# Altium PCB Throttle By Wire.PcbDoc
Units mm, origin at the board's own origin, x right, y up, seen from the top; angles counter-clockwise.
Board outline 70 x 50 mm, 2 copper layers (Top Layer, Bottom Layer); 12 components, 12 nets, 84 pads, 5 vias.
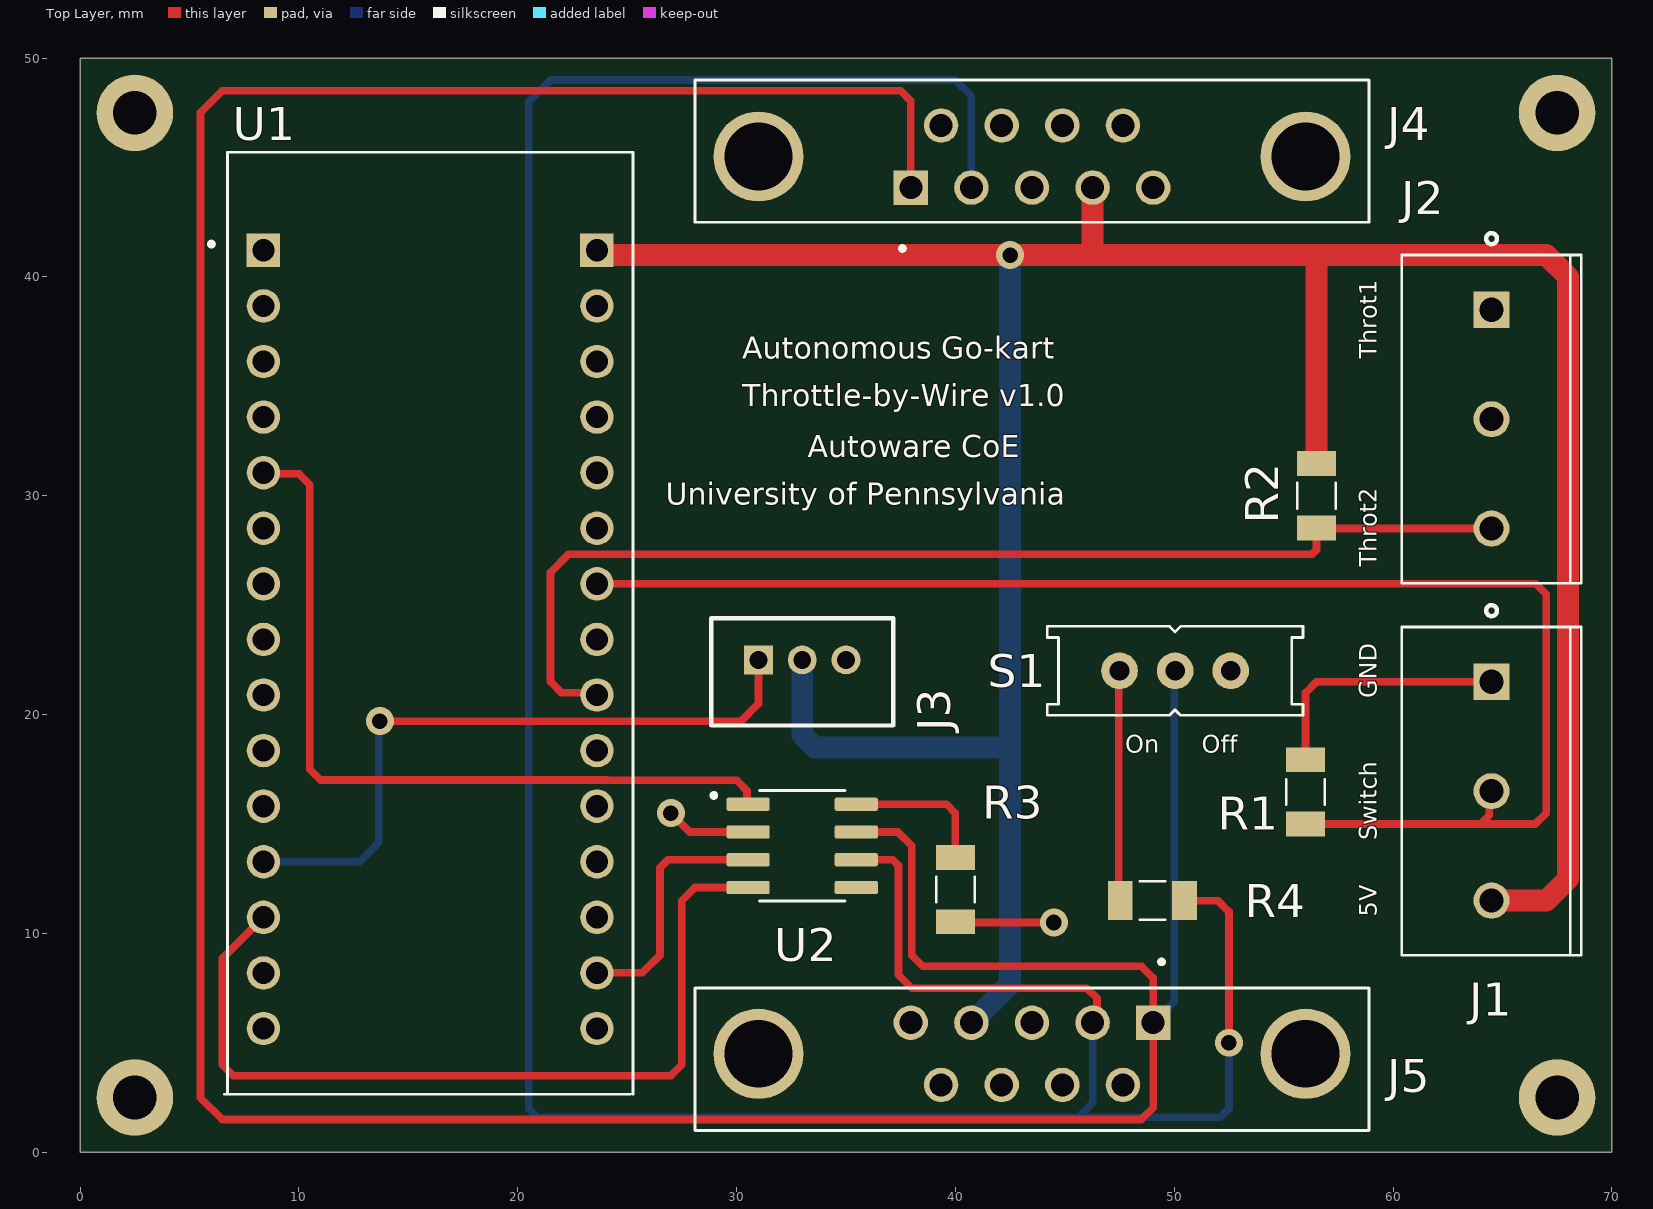
[diagram p0: Top Layer view]
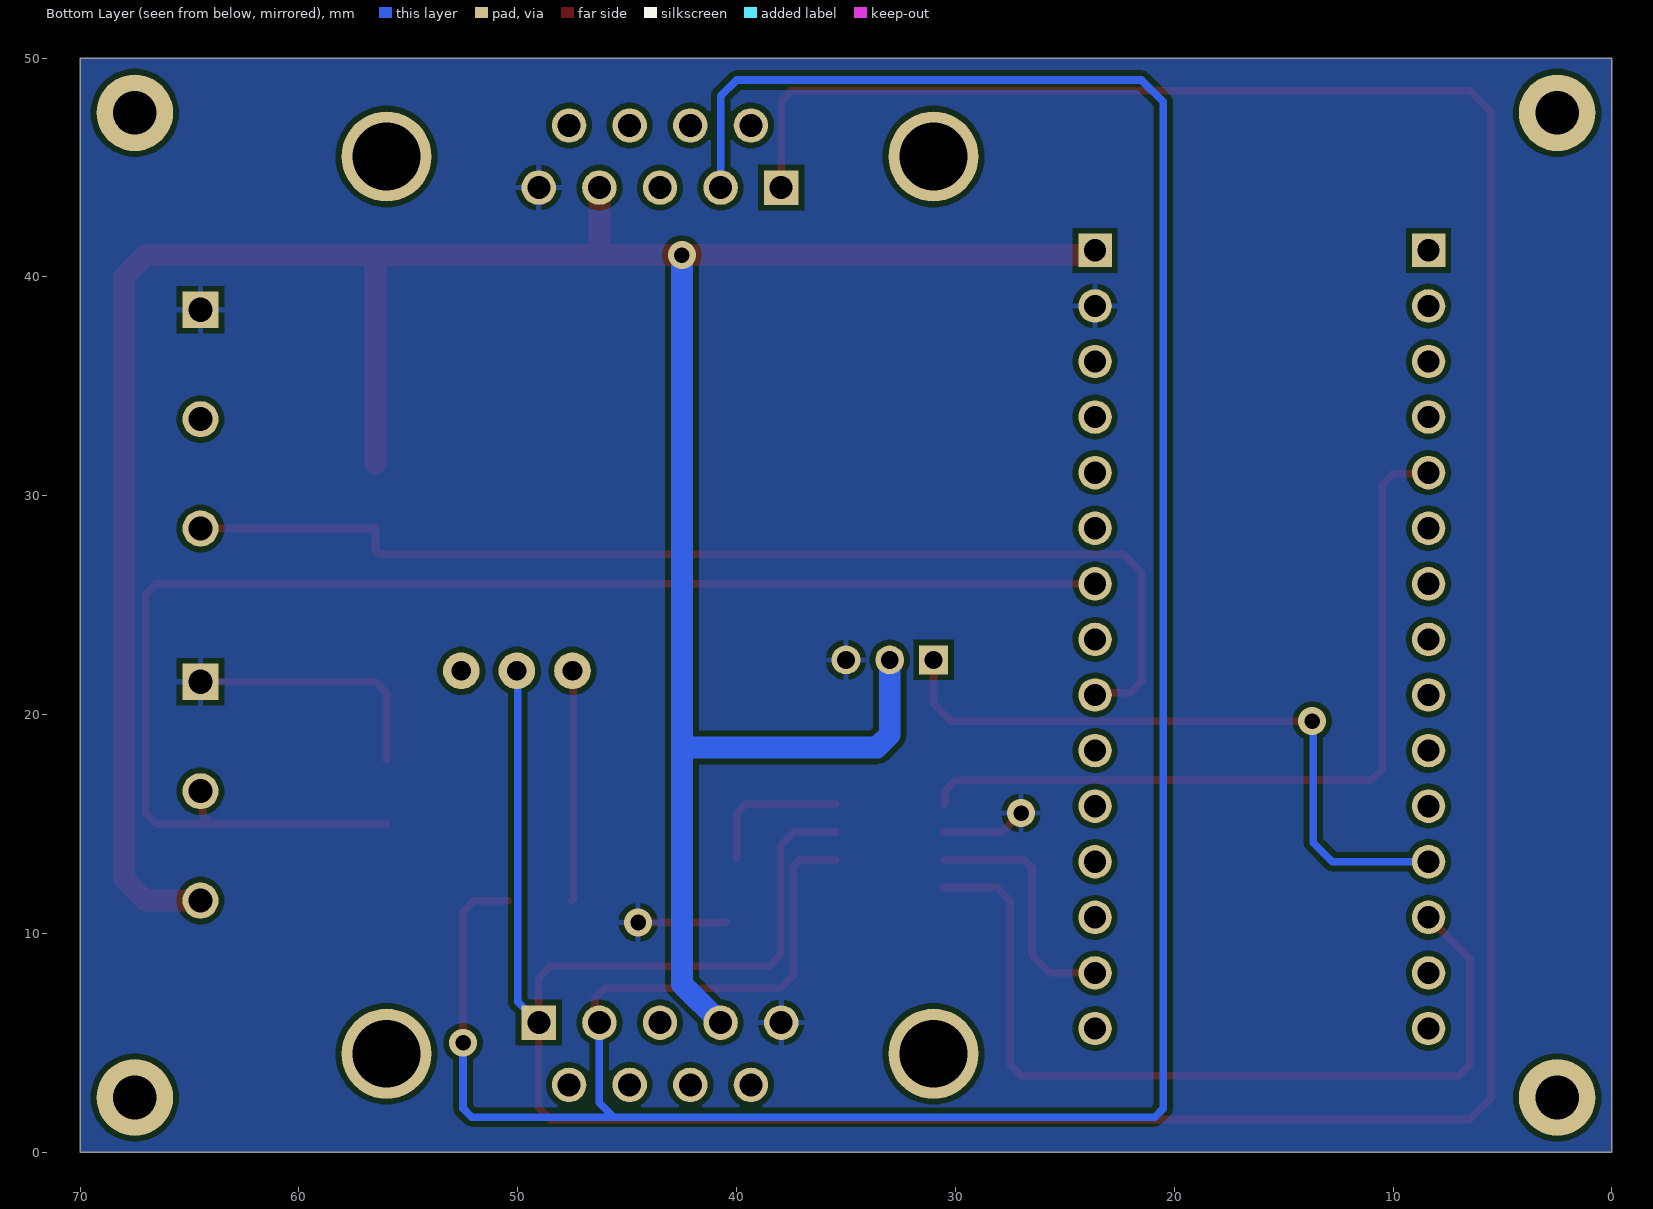
[diagram p1: Bottom Layer view, seen from below]

## Layer stack, top to bottom
Top Solder: solder mask 0.0102, Solder Resist, Dk 3.5
Top Layer: signal copper 0.0356
Dielectric 1: dielectric 0.32, FR-4, Dk 4.8
Bottom Layer: signal copper 0.0356
Bottom Solder: solder mask 0.0102, Solder Resist, Dk 3.5

## Board outline
0,0 0,50 70,50 70,0

## Design rules (kind name [scope] priority, off if disabled: settings)
Clearance [All] p1: gap=0.254 ignorepadtopadclearanceinfootprint=FALSE except(0: Arc-Hole Track-Hole SMDPad-Hole THPad-Hole Via-Hole Fill-Hole Poly-Hole Region-Hole Text-Hole)
HoleSize [All] p1: absolutevalues=TRUE maxlimit=5 minlimit=0.025 maxpercent=80.000 minpercent=20.000
PolygonConnect [All] p1: connectstyle=Relief reliefconductorwidth=0.254 reliefentries=4 polygonreliefangle="90 Angle" airgapwidth=0.254
RoutingVias [All] p1: holewidth=0.711 width=1.27 viastyle="Through Hole" minholewidth=0.711 minwidth=1.27 maxholewidth=0.711 maxwidth=1.27
SolderMaskExpansion [All] p1: expansion=0.102 istentingtop=FALSE
Width [All] p1: maxlimit=2 minlimit=0.254 preferedwidth=0.35 minimp=50.000000 maximp=50.000000 favimp=50.000000
29 further rules are at their usual default settings.

## Classes and differential pairs
component class Sheet1: J1 J5 R1 R2 R3 R4 S1 U1 U2

## Components (designator, comment, footprint, x,y, rotation, side; value= is the part's Value field where it differs from the comment)
J1 "282836-3" TE_282836-3 64.5,16.5 r270 top
J2 "282836-3" TE_282836-3 64.5,33.5 r270 top
J3 "B3B-PH-K" B3B-PH-K 33,22.5 r0 top
J4 "A-DF_09_A_KG-T2S" ASSMANN_A-DF_09_A_KG-T2S 43.5,45.5 r180 top
J5 "A-DF_09_A_KG-T2S" ASSMANN_A-DF_09_A_KG-T2S 43.5,4.5 r0 top
R1 "66K" RESC3216X65N 56,16.47 r90 top
R2 "2.5K" RESC3216X65N 56.5,30 r90 top
R3 "10K" RESC3216X65N 40,12 r270 top
R4 "120" RESC3216X65N 49,11.5 r0 top
S1 "EG1218" EG1218 50.04,22 r180 top
U1 "NUCLEO-L432KC" MODULE_NUCLEO-L432KC 16,25 r0 top
U2 "SN65HVD230QDR" SOIC127P599X175-8N 33,14 r0 top

## Footprints (in the part's own frame and the unit in brackets; to place one, negate y for a bottom-side part, rotate by r counter-clockwise, add the part's x,y. Pads: shape width x height; smd on the part's side, far side on the other; paste and mask are expansions set on the pad)
ASSMANN_A-DF_09_A_KG-T2S [mm]
  rect 1.575x1.575 / inner round 1.575 / far side rect 1.575x1.575 hole 1.05: 1(5.54,1.42)
  round 1.575 hole 1.05: 2(2.77,1.42) 3(0,1.42) 4(-2.77,1.42) 5(-5.54,1.42) 6(4.155,-1.42) 7(1.385,-1.42) 8(-1.385,-1.42) 9(-4.155,-1.42)
  round 4.116 hole 3.1: S1(-12.495,0) S2(12.495,0)
  silkscreen extent -15.41,-3.5 15.41,4.3
B3B-PH-K [mil]
  rect 52x52 hole 32: 1(-78.74,0)
  round 52 hole 32: 2(0,0) 3(78.74,0)
  silkscreen extent -163,-118 163,75, body extent -156,-89 156,89, height 236
EG1218 [mil]
  round 66 hole 35.43: O(-100,0) P(0,0) S(100,0)
  silkscreen extent -230,-80 230,80
MODULE_NUCLEO-L432KC [mm]
  rect 1.53x1.53 hole 1.02: CN3_1(-7.62,16.215) CN4_1(7.62,16.215)
  round 1.53 hole 1.02: CN3_2(-7.62,13.675) CN3_3(-7.62,11.135) CN3_4(-7.62,8.595) CN3_5(-7.62,6.055) CN3_6(-7.62,3.515) CN3_7(-7.62,0.975) CN3_8(-7.62,-1.565) CN3_9(-7.62,-4.105) CN3_10(-7.62,-6.645) CN3_11(-7.62,-9.185) CN3_12(-7.62,-11.725) CN3_13(-7.62,-14.265) CN3_14(-7.62,-16.805) CN3_15(-7.62,-19.345) CN4_2(7.62,13.675) CN4_3(7.62,11.135) CN4_4(7.62,8.595) CN4_5(7.62,6.055) CN4_6(7.62,3.515) CN4_7(7.62,0.975) CN4_8(7.62,-1.565) CN4_9(7.62,-4.105) CN4_10(7.62,-6.645) CN4_11(7.62,-9.185) CN4_12(7.62,-11.725) CN4_13(7.62,-14.265) CN4_14(7.62,-16.805) CN4_15(7.62,-19.345)
  silkscreen extent -10.1,-22.35 9.27,20.7
RESC3216X65N [mm]
  rect 1.13x1.77 smd: 1(-1.47,0) 2(1.47,0)
  silkscreen extent -0.58,-0.88 0.58,0.88
SOIC127P599X175-8N [mm]
  rrect25% 1.97x0.6 smd: 1(-2.47,1.905) 2(-2.47,0.635) 3(-2.47,-0.635) 4(-2.47,-1.905) 5(2.47,-1.905) 6(2.47,-0.635) 7(2.47,0.635) 8(2.47,1.905)
  silkscreen extent -4.14,-2.52 1.95,2.52, body extent -3,-2.45 3,2.45, height 1.75
TE_282836-3 [mm]
  rect 1.65x1.65 hole 1.1: 1(-5,0)
  round 1.65 hole 1.1: 2(0,0) 3(5,0)
  silkscreen extent -8.5,-4.1 7.5,4.1

## Part data
J1 J2: "TERM BLOCK 3POS SIDE ENTRY 5MM", Package=None, Availability=Unavailable, MP=282836-3, Price=None
J3: "Connector Header Through Hole 3 position 0.079 (2.00mm)", Package=None, Availability="No availability data", Check_prices=https://www.snapeda.com/parts/B3B-PH-K/JST/view-part/2895696/?ref=eda, MF=JST, MP=B3B-PH-K, Price=None, SnapEDA_Link=https://www.snapeda.com/parts/B3B-PH-K/JST/view-part/2895696/?ref=snap
J4 J5: "9 Position D-Sub Receptacle, Female Sockets Connector", Package=None, Availability="In Stock", Check_prices=https://www.snapeda.com/parts/A-DF%2009%20A/KG-T2S/Assmann+WSW+Components/view-part/?ref=eda, MF="Assmann WSW", MP="A-DF 09 A/KG-T2S", Price=None, Purchase-URL="https://pricing.snapeda.com/search/part/A-DF 09 A/KG-T2S/?ref=eda", SnapEDA_Link=https://www.snapeda.com/parts/A-DF%2009%20A/KG-T2S/Assmann+WSW+Components/view-part/?ref=snap
R1 R2 R3 R4: library part KTR18EZPF9530, Package=None, Availability=Unavailable, MP=KTR18EZPF9530, Price=None
S1: "<b>SLIDING SWITCH</b><p> 0.1\" spacing through hole, vertical SPDT slide switch <p>http://www.ladyada.net/library/pcb/eaglelibrary.html</p>", Package=None, Availability=Unavailable, MP=EG1218, Price=None
U1: "STM32 Nucleo-32 development board with STM32L432KC MCU, supports Arduino connectivity", Package=None, Availability=Unavailable, MP=NUCLEO-L432KC, Price=None
U2: "3.3-V CAN Transceiver with Standby Mode 8-SOIC -40 to 125", Package="SOIC-8 Texas Instruments", Availability=Good, Check_prices=https://www.snapeda.com/parts/SN65HVD230QDR/Texas%20Instruments/view-part/1178075/?ref=eda, MF="Texas Instruments", MP=SN65HVD230QDR, Price=None, Purchase-URL=https://pricing.snapeda.com/search/part/SN65HVD230QDR/?ref=eda, SnapEDA_Link=https://www.snapeda.com/parts/SN65HVD230QDR/Texas%20Instruments/view-part/1178075/?ref=snap

## Free pads (board coordinates)
  round 3.5 hole 2: 1(2.5,2.5) 2(67.5,2.5) 3(67.5,47.5) 4(2.5,47.5)

## Via types
v1: diameter 1.27, hole 0.711, Top Layer to Bottom Layer, 5 vias

## Nets (pads, with @x,y where several pads share a name; then routed paths per layer and width w, separated by ;. In a path a pad name is that pad's centre, name@x,y a point inside that pad or via, vN(x,y) a via of type N, cw(c..) or ccw(c..) an arc to the next point about the centre after c; other vN are vias at no path point)
3.3V: U1.CN4_14 U2.3 | length 11.6
  Top Layer w0.35: U1.CN4_14 25.695,8.195 26.5,9 26.5,13 26.865,13.365 U2.3
  Bottom Layer w0.35: U1.CN4_14@23.465,8.35 U1.CN4_14
5V: J1.3 J3.2 J4.4 J5.4 R2.2 U1.CN4_1 | length 138
  Top Layer w1: U1.CN4_1 23.835,41 v1(42.5,41) 46,41 ; J4.4 46.27,41.27 46,41 ; R2.2 56.5,41 ; J1.3 67,11.5 68,12.5 68,40 67,41 56.5,41 ; 46,41 56.5,41
  Bottom Layer w1: J3.2 33,19.086 33.586,18.5 42.5,18.5 ; J5.4 42.5,7.69 42.5,18.5 ; v1(42.5,41) 42.5,18.5
CAN_HIGH: J4.1 J5.1 S1.P U2.7 | length 167.9
  Top Layer w0.35: U2.7 37.365,14.635 38,14 38,9 38.5,8.5 48.5,8.5 49.04,7.96 J5.1 49.04,2.04 48.5,1.5 6.5,1.5 5.5,2.5 5.5,47.5 6.5,48.5 37.5,48.5 37.96,48.04 J4.1
  Bottom Layer w0.35: J5.1 50,6.88 S1.P@50,22
CAN_LOW: J4.2 J5.2 R4.2 U2.6 | length 137
  Top Layer w0.35: U2.6 37.135,13.365 37.396,13.104 37.396,8.104 38,7.5 46,7.5 46.473,7.027 46.473,6.123 J5.2 ; R4.2 52,11.5 52.5,11 v1(52.5,5)
  Bottom Layer w0.35: J4.2 40.73,48.27 40,49 21.5,49 20.5,48 20.5,2 20.896,1.604 45.604,1.604 ; J5.2 46.27,2.27 45.604,1.604 ; v1(52.5,5) 52.5,2 52.104,1.604 45.604,1.604
CAN_RX: U1.CN3_13 U2.4 | length 39.7
  Top Layer w0.35: U1.CN3_13 6.5,8.855 6.5,4 7,3.5 27,3.5 27.5,4 27.5,11.5 28.095,12.095 U2.4
CAN_TX: U1.CN3_5 U2.1 | length 36.4
  Top Layer w0.35: U1.CN3_5 8.435,31 10,31 10.5,30.5 10.5,17.5 10.991,17.009 24.115,17.009 24.124,17 30,17 30.475,16.525 30.475,15.96 U2.1
GND: J1.1 J2.1 J3.3 J4.5 J5.5 R1.2 R3.2 U1.CN4_2 U2.2 | length 19.7
  Top Layer w0.35: v1(27,15.5) 27.865,14.635 U2.2 ; R3.2@40.5,10.53 40.53,10.5 v1(44.5,10.5) ; R1.2 56,21 56.5,21.5 J1.1
NetR3_1: R3.1 U2.8 | length 6.7
  Top Layer w0.35: U2.8 39.595,15.905 40,15.5 R3.1
NetR4_1: R4.1 S1.S | length 10.5
  Top Layer w0.35: S1.S@47.46,22 47.46,11.57 R4.1
SERVO: J3.1 U1.CN3_12 | length 30.8
  Top Layer w0.35: v1(13.701,19.701) 30.201,19.701 31,20.5 J3.1
  Bottom Layer w0.35: U1.CN3_12 12.775,13.275 13.646,14.146 13.646,19.646 v1(13.701,19.701)
Switch: J1.2 R1.1 U1.CN4_7 | length 66.5
  Top Layer w0.35: U1.CN4_7 66.525,25.975 67,25.5 67,15.5 66.5,15 64,15 ; R1.1 64,15 ; J1.2 64.395,16.395 64.395,15.395 64,15
Throttle: J2.3 R2.1 U1.CN4_9 | length 51.8
  Top Layer w0.35: U1.CN4_9 23.515,21 22,21 21.5,21.5 21.5,26.5 22.32,27.32 56.295,27.32 56.5,27.525 R2.1 56.53,28.5 J2.3
pads on no net: J2.2 J4.3 J4.6 J4.7 J4.8 J4.9 J4.S1 J4.S2 J5.3 J5.6 J5.7 J5.8 J5.9 J5.S1 J5.S2 S1.O U1.CN3_1 U1.CN3_2 U1.CN3_3 U1.CN3_4 U1.CN3_6 U1.CN3_7 U1.CN3_8 U1.CN3_9 U1.CN3_10 U1.CN3_11 U1.CN3_14 U1.CN3_15 U1.CN4_3 U1.CN4_4 U1.CN4_5 U1.CN4_6 U1.CN4_8 U1.CN4_10 U1.CN4_11 U1.CN4_12 U1.CN4_13 U1.CN4_15 U2.5

## Polygon pours and split planes (outlines as drawn)
GND on Bottom Layer "GND_L02_P000" (solid, pour order 0): 0,50 70,50 70,0 0,0

## Silkscreen, mask and mechanical layers (free items; w line width, h text height)
Top Overlay:
  text "Autonomous Go-kart" at 30.254,36.254 h1
  text "Throt1" at 59.246,36.254 h0.8 r90
  text "Throttle-by-Wire v1.0" at 30.254,34.087 h1
  text "Autoware CoE" at 33.254,31.754 h1
  text "University of Pennsylvania" at 26.754,29.587 h1
  text "Throt2" at 59.246,26.754 h0.8 r90
  text "GND" at 59.246,20.754 h0.8 r90
  text "On" at 47.754,18.254 h0.8
  text "Off" at 51.254,18.254 h0.8
  text "Switch" at 59.246,14.254 h0.8 r90
  text "5V" at 59.246,10.754 h0.8 r90
Mechanical 1:
  lines w0.001: 0,0 70,0 ; 0,0 0,50 ; 0,0 70,0 ; 0,0 0,50 ; 0,50 70,50 ; 0,50 70,50 ; 70,0 70,50 ; 70,0 70,50
  lines w0.254: 0,0 70,0 70,50 0,50 0,0